# EAGLE board USB (EAGLE 9.2.0)
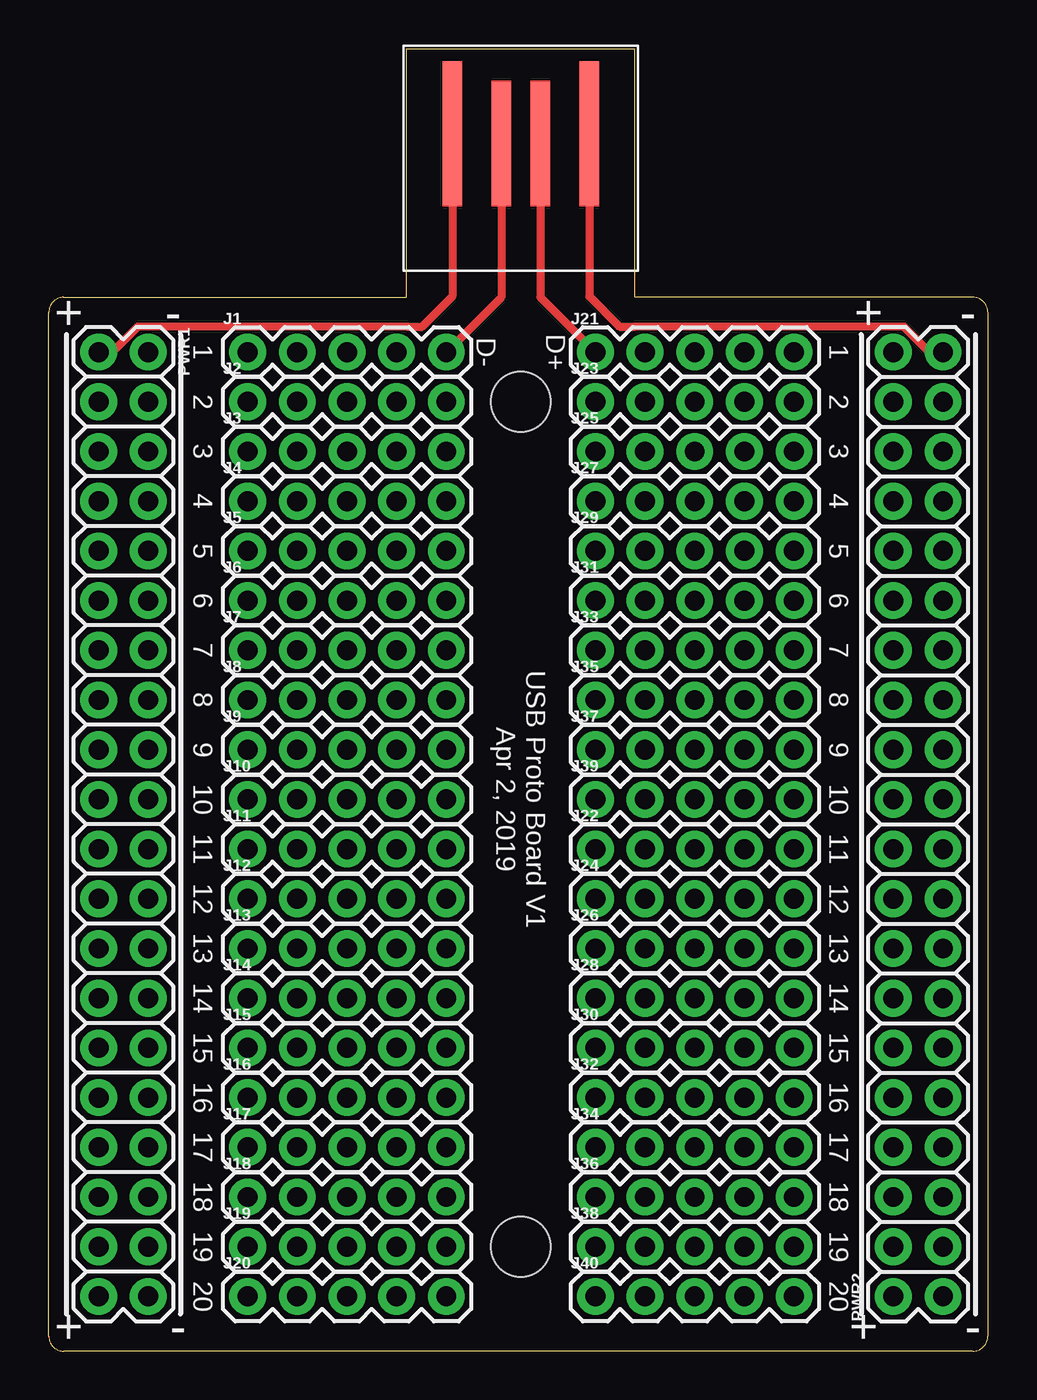
[diagram p0: board, top side]
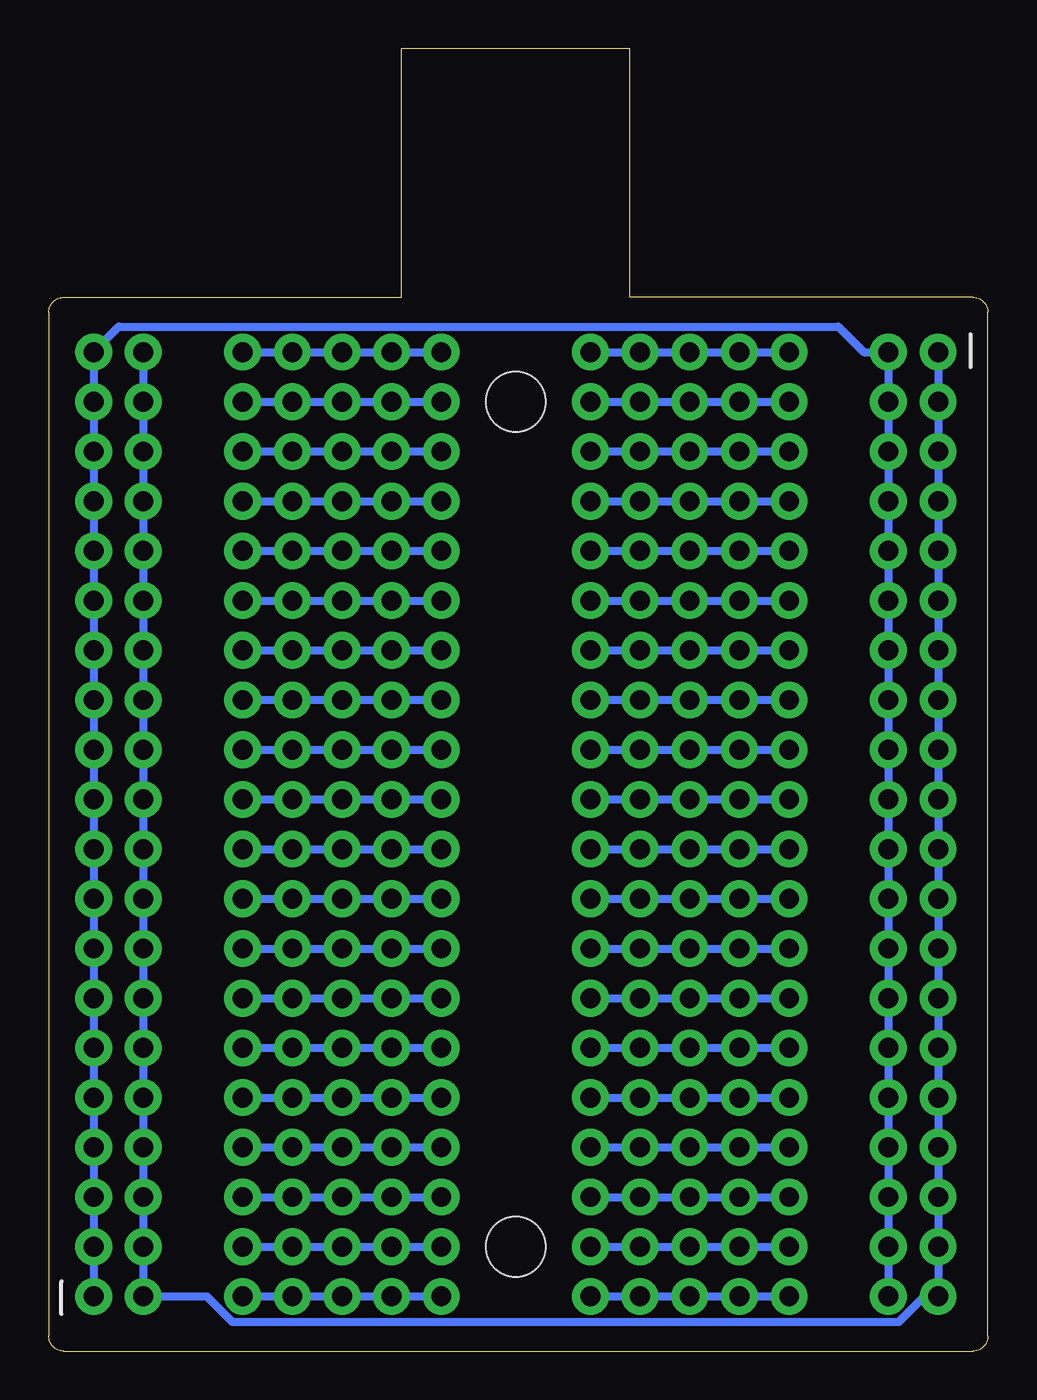
[diagram p1: board, bottom side, seen from below]

Size 48.01 x 66.55 mm. Coordinates in mm from the lower left corner, seen from the top.
Outline: 0.76,53.85 arc90 0,53.09 0,0.76 arc90 0.76,0 47.24,0 arc90 48.01,0.76 48.01,53.09 arc90 47.24,53.85 29.97,53.85 29.97,66.55 18.29,66.55 18.29,53.85 0.76,53.85
Copper layers (1*16): Top 0.035mm / dielectric 1.5mm / Bottom 0.035mm
Design rules "default *": minimum track width 16mil, minimum drill 0.35mm, track to track 16mil, track to pad 6mil, pad to pad 6mil, via to via 6mil, smd to smd 6mil, copper to edge 40mil, drill to drill 6mil, minimum pad ring 10mil, minimum via ring 8mil, stop-mask expansion 4mil, vias tented up to drill 0mil, thermal gap 10mil
Net classes: 1 power: width 0.178 mm
Holes 3.05 mm at 24.13,48.51 24.13,5.33

## Footprints (pad centres in the part's own frame; a part is rotated, then mirrored left to right if it is on the bottom)
1X05 = drill 1.016 pad 1.88: 1 0,0; 2 2.54,0; 3 5.08,0; 4 7.62,0; 5 10.16,0
2X20 = drill 1.016 pad 1.88: 1 0,0; 2 0,2.54; 3 2.54,0; 4 2.54,2.54; 5 5.08,0; 6 5.08,2.54; 7 7.62,0; 8 7.62,2.54; 9 10.16,0; 10 10.16,2.54; 11 12.7,0; 12 12.7,2.54; 13 15.24,0; 14 15.24,2.54; 15 17.78,0; 16 17.78,2.54; 17 20.32,0; 18 20.32,2.54; 19 22.86,0; 20 22.86,2.54; 21 25.4,0; 22 25.4,2.54; 23 27.94,0; 24 27.94,2.54; 25 30.48,0; 26 30.48,2.54; 27 33.02,0; 28 33.02,2.54; 29 35.56,0; 30 35.56,2.54; 31 38.1,0; 32 38.1,2.54; 33 40.64,0; 34 40.64,2.54; 35 43.18,0; 36 43.18,2.54; 37 45.72,0; 38 45.72,2.54; 39 48.26,0; 40 48.26,2.54
USB_ON_BOARD = smd 6.41 x 1: D+ 0,1; D- 0,-1 | smd 7.41 x 1: GND -0.5,3.5; VCC -0.5,-3.5

## Placement (x,y rotation side)
J1  [1X05]  10.16,51.05 0 top
J2  [1X05]  10.16,48.51 0 top
J3  [1X05]  10.16,45.97 0 top
J4  [1X05]  10.16,43.43 0 top
J5  [1X05]  10.16,40.89 0 top
J6  [1X05]  10.16,38.35 0 top
J7  [1X05]  10.16,35.81 0 top
J8  [1X05]  10.16,33.27 0 top
J9  [1X05]  10.16,30.73 0 top
J10  [1X05]  10.16,28.19 0 top
J11  [1X05]  10.16,25.65 0 top
J12  [1X05]  10.16,23.11 0 top
J13  [1X05]  10.16,20.57 0 top
J14  [1X05]  10.16,18.03 0 top
J15  [1X05]  10.16,15.49 0 top
J16  [1X05]  10.16,12.95 0 top
J17  [1X05]  10.16,10.41 0 top
J18  [1X05]  10.16,7.87 0 top
J19  [1X05]  10.16,5.33 0 top
J20  [1X05]  10.16,2.79 0 top
J21  [1X05]  27.94,51.05 0 top
J22  [1X05]  27.94,25.65 0 top
J23  [1X05]  27.94,48.51 0 top
J24  [1X05]  27.94,23.11 0 top
J25  [1X05]  27.94,45.97 0 top
J26  [1X05]  27.94,20.57 0 top
J27  [1X05]  27.94,43.43 0 top
J28  [1X05]  27.94,18.03 0 top
J29  [1X05]  27.94,40.89 0 top
J30  [1X05]  27.94,15.49 0 top
J31  [1X05]  27.94,38.35 0 top
J32  [1X05]  27.94,12.95 0 top
J33  [1X05]  27.94,35.81 0 top
J34  [1X05]  27.94,10.41 0 top
J35  [1X05]  27.94,33.27 0 top
J36  [1X05]  27.94,7.87 0 top
J37  [1X05]  27.94,30.73 0 top
J38  [1X05]  27.94,5.33 0 top
J39  [1X05]  27.94,28.19 0 top
J40  [1X05]  27.94,2.79 0 top
PWR1  CONN_20X2  [2X20]  2.54,51.05 270 top
PWR2  CONN_20X2  [2X20]  45.72,2.79 90 top
U$2  USB_ON_BOARD  [USB_ON_BOARD]  24.13,61.72 270 top

## Library data of the parts
J1-J40 PWR1 PWR2 = SparkFun-Connectors
U$2 = Scott-Connectors

## Nets
N$1: J1.1 J1.2 J1.3 J1.4 J1.5 U$2.D-
N$2: J2.1 J2.2 J2.3 J2.4 J2.5
N$3: J3.1 J3.2 J3.3 J3.4 J3.5
N$4: J4.1 J4.2 J4.3 J4.4 J4.5
N$5: J5.1 J5.2 J5.3 J5.4 J5.5
N$6: J6.1 J6.2 J6.3 J6.4 J6.5
N$7: J7.1 J7.2 J7.3 J7.4 J7.5
N$8: J8.1 J8.2 J8.3 J8.4 J8.5
N$9: J9.1 J9.2 J9.3 J9.4 J9.5
N$10: J10.1 J10.2 J10.3 J10.4 J10.5
N$11: J11.1 J11.2 J11.3 J11.4 J11.5
N$12: J12.1 J12.2 J12.3 J12.4 J12.5
N$13: J13.1 J13.2 J13.3 J13.4 J13.5
N$14: J14.1 J14.2 J14.3 J14.4 J14.5
N$15: J15.1 J15.2 J15.3 J15.4 J15.5
N$16: J16.1 J16.2 J16.3 J16.4 J16.5
N$17: J17.1 J17.2 J17.3 J17.4 J17.5
N$18: J18.1 J18.2 J18.3 J18.4 J18.5
N$19: J19.1 J19.2 J19.3 J19.4 J19.5
N$20: J20.1 J20.2 J20.3 J20.4 J20.5
N$21: J21.1 J21.2 J21.3 J21.4 J21.5 U$2.D+
N$22: J22.1 J22.2 J22.3 J22.4 J22.5
N$23: J23.1 J23.2 J23.3 J23.4 J23.5
N$24: J24.1 J24.2 J24.3 J24.4 J24.5
N$25: J25.1 J25.2 J25.3 J25.4 J25.5
N$26: J26.1 J26.2 J26.3 J26.4 J26.5
N$27: J27.1 J27.2 J27.3 J27.4 J27.5
N$28: J28.1 J28.2 J28.3 J28.4 J28.5
N$29: J29.1 J29.2 J29.3 J29.4 J29.5
N$30: J30.1 J30.2 J30.3 J30.4 J30.5
N$31: J31.1 J31.2 J31.3 J31.4 J31.5
N$32: J32.1 J32.2 J32.3 J32.4 J32.5
N$33: J33.1 J33.2 J33.3 J33.4 J33.5
N$34: J34.1 J34.2 J34.3 J34.4 J34.5
N$35: J35.1 J35.2 J35.3 J35.4 J35.5
N$36: J36.1 J36.2 J36.3 J36.4 J36.5
N$37: J37.1 J37.2 J37.3 J37.4 J37.5
N$38: J38.1 J38.2 J38.3 J38.4 J38.5
N$39: J39.1 J39.2 J39.3 J39.4 J39.5
N$40: J40.1 J40.2 J40.3 J40.4 J40.5
N$41: PWR1.1 PWR1.3 PWR1.5 PWR1.7 PWR1.9 PWR1.11 PWR1.13 PWR1.15 PWR1.17 PWR1.19 PWR1.21 PWR1.23 PWR1.25 PWR1.27 PWR1.29 PWR1.31 PWR1.33 PWR1.35 PWR1.37 PWR1.39 PWR2.2 PWR2.4 PWR2.6 PWR2.8 PWR2.10 PWR2.12 PWR2.14 PWR2.16 PWR2.18 PWR2.20 PWR2.22 PWR2.24 PWR2.26 PWR2.28 PWR2.30 PWR2.32 PWR2.34 PWR2.36 PWR2.38 PWR2.40 U$2.VCC
N$42: PWR1.2 PWR1.4 PWR1.6 PWR1.8 PWR1.10 PWR1.12 PWR1.14 PWR1.16 PWR1.18 PWR1.20 PWR1.22 PWR1.24 PWR1.26 PWR1.28 PWR1.30 PWR1.32 PWR1.34 PWR1.36 PWR1.38 PWR1.40 PWR2.1 PWR2.3 PWR2.5 PWR2.7 PWR2.9 PWR2.11 PWR2.13 PWR2.15 PWR2.17 PWR2.19 PWR2.21 PWR2.23 PWR2.25 PWR2.27 PWR2.29 PWR2.31 PWR2.33 PWR2.35 PWR2.37 PWR2.39 U$2.GND

## Tracks (layer width: path | path; a pad name or v marks a point on that pad's centre or on a via)
N$1
  Top 0.406: U$2.D- 23.13,53.86 J1.5
  Bottom 0.406: J1.1 J1.2 J1.3 J1.4 J1.5
N$2
  Bottom 0.406: J2.1 J2.2 J2.3 J2.4 J2.5
N$3
  Bottom 0.406: J3.1 J3.2 J3.3 J3.4 J3.5
N$4
  Bottom 0.406: J4.1 J4.2 J4.3 J4.4 J4.5
N$5
  Bottom 0.406: J5.1 J5.2 J5.3 J5.4 J5.5
N$6
  Bottom 0.406: J6.1 J6.2 J6.3 J6.4 J6.5
N$7
  Bottom 0.406: J7.1 J7.2 J7.3 J7.4 J7.5
N$8
  Bottom 0.406: J8.1 J8.2 J8.3 J8.4 J8.5
N$9
  Bottom 0.406: J9.1 J9.2 J9.3 J9.4 J9.5
N$10
  Bottom 0.406: J10.1 J10.2 J10.3 J10.4 J10.5
N$11
  Bottom 0.406: J11.1 J11.2 J11.3 J11.4 J11.5
N$12
  Bottom 0.406: J12.1 J12.2 J12.3 J12.4 J12.5
N$13
  Bottom 0.406: J13.1 J13.2 J13.3 J13.4 J13.5
N$14
  Bottom 0.406: J14.1 J14.2 J14.3 J14.4 J14.5
N$15
  Bottom 0.406: J15.1 J15.2 J15.3 J15.4 J15.5
N$16
  Bottom 0.406: J16.1 J16.2 J16.3 J16.4 J16.5
N$17
  Bottom 0.406: J17.1 J17.2 J17.3 J17.4 J17.5
N$18
  Bottom 0.406: J18.1 J18.2 J18.3 J18.4 J18.5
N$19
  Bottom 0.406: J19.1 J19.2 J19.3 J19.4 J19.5
N$20
  Bottom 0.406: J20.1 J20.2 J20.3 J20.4 J20.5
N$21
  Top 0.406: U$2.D+ 25.13,53.86 J21.1
  Bottom 0.406: J21.1 J21.2 J21.3 J21.4 J21.5
N$22
  Bottom 0.406: J22.1 J22.2 J22.3 J22.4 J22.5
N$23
  Bottom 0.406: J23.1 J23.2 J23.3 J23.4 J23.5
N$24
  Bottom 0.406: J24.1 J24.2 J24.3 J24.4 J24.5
N$25
  Bottom 0.406: J25.1 J25.2 J25.3 J25.4 J25.5
N$26
  Bottom 0.406: J26.1 J26.2 J26.3 J26.4 J26.5
N$27
  Bottom 0.406: J27.1 J27.2 J27.3 J27.4 J27.5
N$28
  Bottom 0.406: J28.1 J28.2 J28.3 J28.4 J28.5
N$29
  Bottom 0.406: J29.1 J29.2 J29.3 J29.4 J29.5
N$30
  Bottom 0.406: J30.1 J30.2 J30.3 J30.4 J30.5
N$31
  Bottom 0.406: J31.1 J31.2 J31.3 J31.4 J31.5
N$32
  Bottom 0.406: J32.1 J32.2 J32.3 J32.4 J32.5
N$33
  Bottom 0.406: J33.1 J33.2 J33.3 J33.4 J33.5
N$34
  Bottom 0.406: J34.1 J34.2 J34.3 J34.4 J34.5
N$35
  Bottom 0.406: J35.1 J35.2 J35.3 J35.4 J35.5
N$36
  Bottom 0.406: J36.1 J36.2 J36.3 J36.4 J36.5
N$37
  Bottom 0.406: J37.1 J37.2 J37.3 J37.4 J37.5
N$38
  Bottom 0.406: J38.1 J38.2 J38.3 J38.4 J38.5
N$39
  Bottom 0.406: J39.1 J39.2 J39.3 J39.4 J39.5
N$40
  Bottom 0.406: J40.1 J40.2 J40.3 J40.4 J40.5
N$41
  Top 0.406: U$2.VCC 20.63,53.9 19.05,52.32 18.34,52.32 18.32,52.35 4.54,52.35 3.25,51.05 PWR1.1
  Bottom 0.406: PWR2.40 PWR2.38 PWR2.36 PWR2.34 PWR2.32 PWR2.30 PWR2.28 PWR2.26 PWR2.24 PWR2.22 PWR2.20 PWR2.18 PWR2.16 PWR2.14 PWR2.12 PWR2.10 PWR2.8 PWR2.6 PWR2.4 PWR2.2 39.93,2.79 38.64,1.5 4.54,1.5 3.25,2.79 PWR1.39 PWR1.37 PWR1.35 PWR1.33 PWR1.31 PWR1.29 PWR1.27 PWR1.25 PWR1.23 PWR1.21 PWR1.19 PWR1.17 PWR1.15 PWR1.13 PWR1.11 PWR1.9 PWR1.7 PWR1.5 PWR1.3 PWR1.1
N$42
  Top 0.406: U$2.GND 27.63,53.9 29.21,52.32 29.92,52.32 29.94,52.35 43.72,52.35 45.01,51.05 PWR2.39
  Bottom 0.406: PWR2.1 PWR2.3 PWR2.5 PWR2.7 PWR2.9 PWR2.11 PWR2.13 PWR2.15 PWR2.17 PWR2.19 PWR2.21 PWR2.23 PWR2.25 PWR2.27 PWR2.29 PWR2.31 PWR2.33 PWR2.35 PWR2.37 PWR2.39 44.43,52.35 7.64,52.35 6.35,51.05 PWR1.2 PWR1.4 PWR1.6 PWR1.8 PWR1.10 PWR1.12 PWR1.14 PWR1.16 PWR1.18 PWR1.20 PWR1.22 PWR1.24 PWR1.26 PWR1.28 PWR1.30 PWR1.32 PWR1.34 PWR1.36 PWR1.38 PWR1.40

## Text on the board
tPlace: + | - | + | - | 1 | D- | D+ | 1 | 2 | 2 | 3 | 3 | 4 | 4 | 5 | 5 | 6 | 6 | 7 | 7 | 8 | 8 | 9 | 9 | 10 | USB Proto Board V1 / Apr 2, 2019 | 10 | 11 | 11 | 12 | 12 | 13 | 13 | 14 | 14 | 15 | 15 | 16 | 16 | 17 | 17 | 18 | 18 | 19 | 19 | 20 | 20 | + | - | + | -